# Altium PCB PCB1.PcbDoc
Units mm, origin at the board's own origin, x right, y up, seen from the top; angles counter-clockwise.
Board outline 110 x 25 mm, 2 copper layers (Top Layer, Bottom Layer), stack 1.4 mm thick; 11 components, 0 nets, 162 pads, 0 vias.
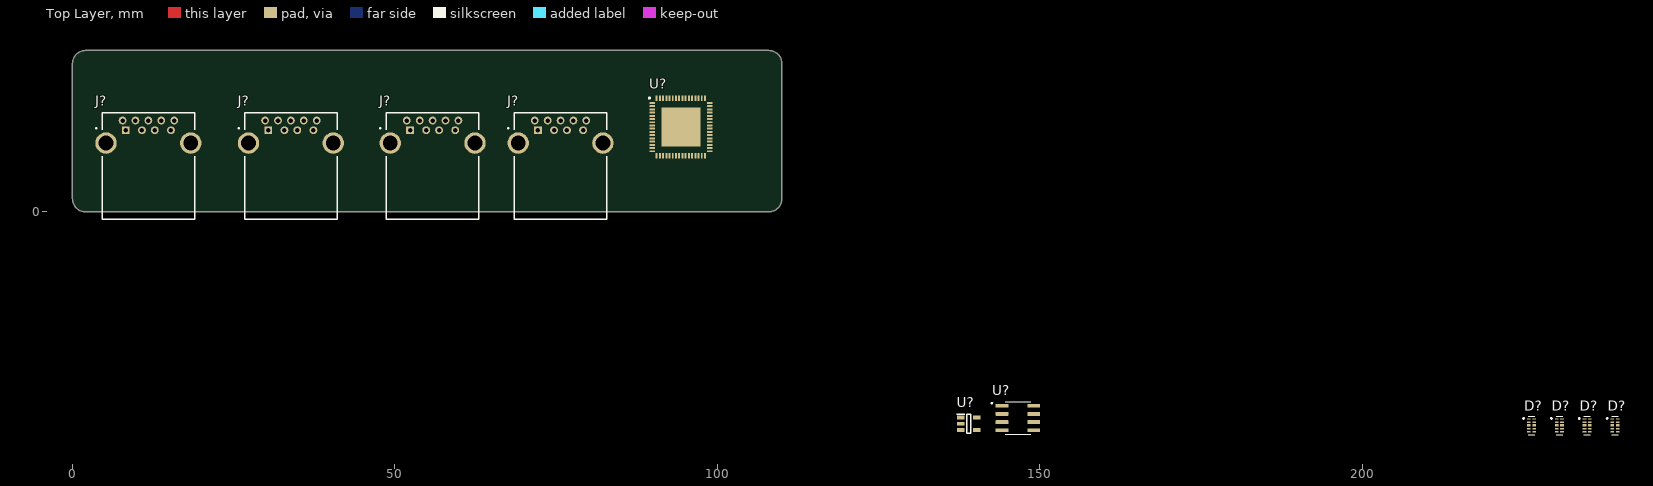
[diagram p0: Top Layer view]
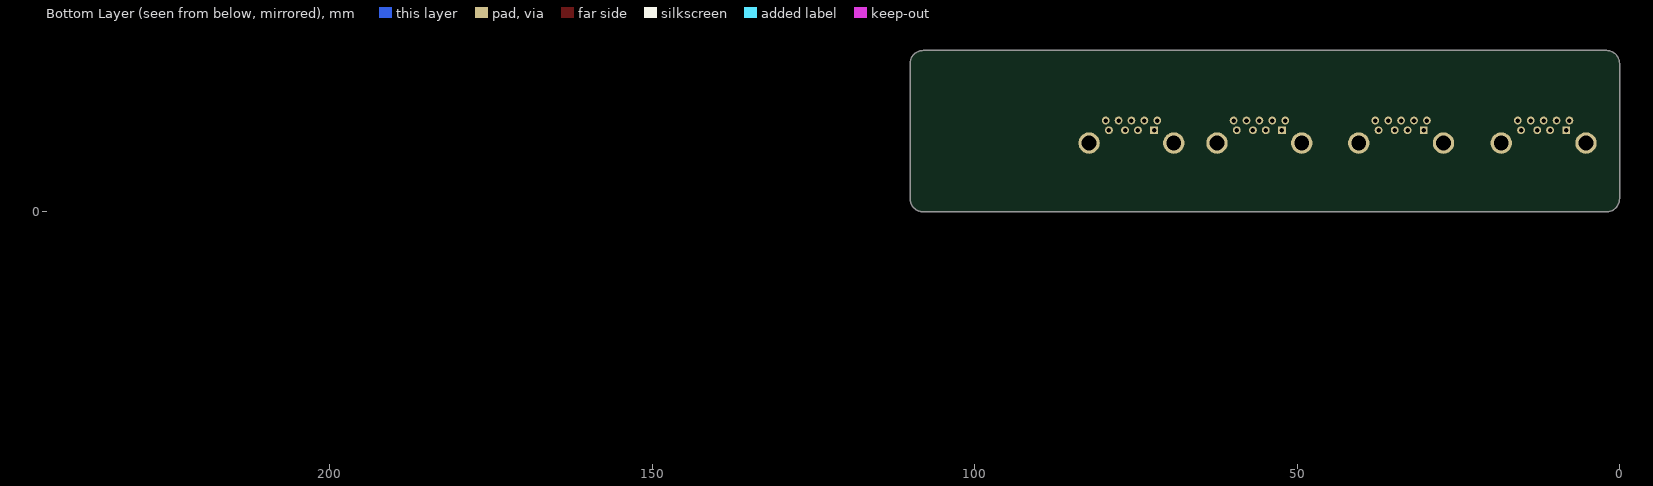
[diagram p1: Bottom Layer view, seen from below]

## Layer stack, top to bottom
Top Solder: solder mask 0.0254, SM-002, Dk 4
Top Layer: signal copper 0.035
Dielectric 1: dielectric 1.33, FR-4, Dk 4.8
Bottom Layer: signal copper 0.035
Bottom Solder: solder mask 0.0254, SM-002, Dk 4

## Board outline
0,2 0,23 cw(c2,23) 2,25 108,25 cw(c108,23) 110,23 110,2 cw(c108,2) 108,0 2,0 cw(c2,2)

## Design rules (kind name [scope] priority, off if disabled: settings)
Clearance [All] p1: gap=0.254 ignorepadtopadclearanceinfootprint=FALSE
PolygonConnect [All] p1: connectstyle=Relief reliefconductorwidth=0.254 reliefentries=4 polygonreliefangle="90 Angle" airgapwidth=0.254
RoutingVias [All] p1: holewidth=0.711 width=1.27 viastyle="Through Hole" minholewidth=0.711 minwidth=1.27 maxholewidth=0.711 maxwidth=1.27
SolderMaskExpansion [All] p1: expansion=0.102 istentingtop=FALSE
Width [All] p1: maxlimit=0.254 minlimit=0.254 preferedwidth=0.254
30 further rules are at their usual default settings.

## Classes and differential pairs
component class Sheet1: D? J? U?

## Components (designator, comment, footprint, x,y, rotation, side; value= is the part's Value field where it differs from the comment)
D? "ESD204DQAR" DQA0010A 226.237,-33.134 r0 top
D? "ESD204DQAR" DQA0010A 230.555,-33.134 r0 top
D? "ESD204DQAR" DQA0010A 239.191,-33.134 r0 top
D? "ESD204DQAR" DQA0010A 234.873,-33.134 r0 top
J? "USB1135-15-9-L-B" USB1135-15-9-L-B 55.842,10.641 r0 top
J? "USB1135-15-9-L-B" USB1135-15-9-L-B 33.869,10.641 r0 top
J? "USB1135-15-9-L-B" USB1135-15-9-L-B 11.768,10.641 r0 top
J? "USB1135-15-9-L-B" USB1135-15-9-L-B 75.68,10.641 r0 top
U? "TUSB8042ARGCT" RGC0064G 94.332,13.121 r0 top
U? "AT24C04D-SSHM-B" SOIC-8 146.608,-31.991 r0 top
U? "TPS2001DDBVR" DBV0005A 138.988,-32.88 r0 top

## Footprints (in the part's own frame and the unit in brackets; to place one, negate y for a bottom-side part, rotate by r counter-clockwise, add the part's x,y. Pads: shape width x height; smd on the part's side, far side on the other; paste and mask are expansions set on the pad)
DBV0005A [mm]
  rect 1.2x0.6 smd: 1(-1.25,0.95) 2(-1.25,0) 3(-1.25,-0.95) 4(1.25,-0.95) 5(1.25,0.95)
  silkscreen extent -1.85,-1.45 0.3,1.5, body extent -1.4,-1.45 1.4,1.45, height 1.2
DQA0010A [mm]
  rrect5% 0.565x0.2 smd: 1(-0.417,1) 2(-0.417,0.5) 4(-0.417,-0.5) 5(-0.417,-1) 6(0.417,-1) 7(0.417,-0.5) 9(0.417,0.5) 10(0.417,1)
  rrect5% 0.565x0.4 smd paste-1: 3(-0.417,0) 8(0.417,0)
  silkscreen extent -1.32,-1.42 0.5,1.42, body extent -0.5,-1.25 0.5,1.25, height 0.55
RGC0064G [mm]
  rect 0.85x0.3 smd: 1(-4.45,3.75) 2(-4.45,3.25) 3(-4.45,2.75) 4(-4.45,2.25) 5(-4.45,1.75) 6(-4.45,1.25) 7(-4.45,0.75) 8(-4.45,0.25) 9(-4.45,-0.25) 10(-4.45,-0.75) 11(-4.45,-1.25) 12(-4.45,-1.75) 13(-4.45,-2.25) 14(-4.45,-2.75) 15(-4.45,-3.25) 16(-4.45,-3.75) 33(4.45,-3.75) 34(4.45,-3.25) 35(4.45,-2.75) 36(4.45,-2.25) 37(4.45,-1.75) 38(4.45,-1.25) 39(4.45,-0.75) 40(4.45,-0.25) 41(4.45,0.25) 42(4.45,0.75) 43(4.45,1.25) 44(4.45,1.75) 45(4.45,2.25) 46(4.45,2.75) 47(4.45,3.25) 48(4.45,3.75)
  rect 0.3x0.85 smd: 17(-3.75,-4.45) 18(-3.25,-4.45) 19(-2.75,-4.45) 20(-2.25,-4.45) 21(-1.75,-4.45) 22(-1.25,-4.45) 23(-0.75,-4.45) 24(-0.25,-4.45) 25(0.25,-4.45) 26(0.75,-4.45) 27(1.25,-4.45) 28(1.75,-4.45) 29(2.25,-4.45) 30(2.75,-4.45) 31(3.25,-4.45) 32(3.75,-4.45) 49(3.75,4.45) 50(3.25,4.45) 51(2.75,4.45) 52(2.25,4.45) 53(1.75,4.45) 54(1.25,4.45) 55(0.75,4.45) 56(0.25,4.45) 57(-0.25,4.45) 58(-0.75,4.45) 59(-1.25,4.45) 60(-1.75,4.45) 61(-2.25,4.45) 62(-2.75,4.45) 63(-3.25,4.45) 64(-3.75,4.45)
  rect 6.05x6.05 smd: 65(0,0)
  silkscreen extent -5,4.38 -4.75,4.62, body extent -4.5,-4.5 4.5,4.5, height 1
SOIC-8 [mm]
  rrect25% 1.97x0.6 smd: 1(-2.47,1.905) 2(-2.47,0.635) 3(-2.47,-0.635) 4(-2.47,-1.905) 5(2.47,-1.905) 6(2.47,-0.635) 7(2.47,0.635) 8(2.47,1.905)
  silkscreen extent -4.14,-2.52 1.95,2.52, body extent -3,-2.45 3,2.45, height 1.75
USB1135-15-9-L-B [mm]
  rect 1.208x1.208 hole 0.7: 1(-3.5,2)
  round 1.208 hole 0.7: 2(-1,2) 3(1,2) 4(3.5,2) 5(4,3.5) 6(2,3.5) 7(0,3.5) 8(-2,3.5) 9(-4,3.5)
  round 3.316 hole 2.3: S1(-6.57,0) S2(6.57,0)
  silkscreen extent -8.2,-11.78 7.17,4.72, body extent -7.74,-11.78 7.73,4.72, height 7.58

## Part data
D? D? D? D?: "ESD Protection Diodes / TVS Diodes Quad 0.55-pF +/-3.6 -V +/-30-kV ESD pro", Breakdown Voltage="7.9 V", Manufacter="Texas Instruments", Package=DQA0010A, Peak Pulse Current="5.5 A", Peak Pulse Power Dissipation="50 W", Supplier Part Number 1=595-ESD204DQAR, Bidirecional/Unidirecional=ESD204DQAR, Montagem=SMD, Nome=ESD204DQAR, Part Number=ESD204DQAR, Supplier 1=Mouser, Supplier 2=Digikey, Supplier 3=LCSC, Supplier Part Number 2=296-49504-1-ND, Supplier Part Number 3=C553132
J? J? J? J?: "USB Connectors USB A 3.0 Skt RA High Life 15u\" T Hole W/Shell Stake Tray", Manufacter=GCT, Supplier Part Number 1=640-USB1135-15-9-L-B, Colunas=0, Montagem=PTH, Nome=USB1135-15-9-L-B, Part Number=USB1135-15-9-L-B, Pinos por coluna=0, Sub-Tipo=USB, Supplier 1=Mouser, Supplier 2=Digikey, Supplier 3=LCSC, Supplier Part Number 2=2073-USB1135-15-9-L-B-ND, Supplier Part Number 3=C5456888, Total de Pinos=11
U?: "USB Interface IC Four-port USB 3.2 x1 gen1 hub 64-VQFN 0 A 595-TUSB8042ARGCR", Manufacter="Texas Instruments", Package=RGC0064G, Supplier Part Number 1=595-TUSB8042ARGCT, Montagem=SMD, Nome=TUSB8042ARGCT, Part Number=TUSB8042ARGCT, Sub-Tipo="USB HUB", Supplier 1=Mouser, Supplier 2=Digikey, Supplier 3=LCSC, Supplier Part Number 2=296-TUSB8042ARGCT-ND, Supplier Part Number 3=C2678051
U?: "EEPROM 1.7-3.6V, 1MHz, Ind Tmp, 8-SOIC-N", Manufacter="Microchip Technology", Package=SOIC-8, Supplier Part Number 1=556-AT24C04D-SSHM-B, Montagem=SMD, Nome=AT24C04D-SSHM-B, Part Number=AT24C04D-SSHM-B, Sub-Tipo=Memoria, Supplier 1=Mouser, Supplier 2=Digikey, Supplier 3=LCSC, Supplier Part Number 2=AT24C04D-SSHM-B-ND, Supplier Part Number 3=C1349373
U?: "Power Switch ICs - Power Distribution 2A loading 4.5-5.5V 72mohm USB power s A 595-TPS2001DDBVT", Manufacter="Texas Instruments", Package=DBV0005A, Supplier Part Number 1=595-TPS2001DDBVR, Montagem=SMD, Nome=TPS2001DDBVR, Part Number=TPS2001DDBVR, Sub-Tipo="Conversor DC/DC", Supplier 1=Mouser, Supplier 2=Digikey, Supplier 3=LCSC, Supplier Part Number 2=296-50039-1-ND, Supplier Part Number 3=C2150129

## Nets (pads, with @x,y where several pads share a name; then routed paths per layer and width w, separated by ;. In a path a pad name is that pad's centre, name@x,y a point inside that pad or via, vN(x,y) a via of type N, cw(c..) or ccw(c..) an arc to the next point about the centre after c; other vN are vias at no path point)
pads on no net: D?.1 D?.2 D?.3 D?.4 D?.5 D?.6 D?.7 D?.8 D?.9 D?.10 J?.1 J?.2 J?.3 J?.4 J?.5 J?.6 J?.7 J?.8 J?.9 J?.S1 J?.S2 U?.1 U?.2 U?.3 U?.4 U?.5 U?.6 U?.7 U?.8 U?.9 U?.10 U?.11 U?.12 U?.13 U?.14 U?.15 U?.16 U?.17 U?.18 U?.19 U?.20 U?.21 U?.22 U?.23 U?.24 U?.25 U?.26 U?.27 U?.28 U?.29 U?.30 U?.31 U?.32 U?.33 U?.34 U?.35 U?.36 U?.37 U?.38 U?.39 U?.40 U?.41 U?.42 U?.43 U?.44 U?.45 U?.46 U?.47 U?.48 U?.49 U?.50 U?.51 U?.52 U?.53 U?.54 U?.55 U?.56 U?.57 U?.58 U?.59 U?.60 U?.61 U?.62 U?.63 U?.64 U?.65

## Silkscreen, mask and mechanical layers (free items; w line width, h text height)
BoardShape:
  the board outline again, w0.254